# Altium PCB PCB_mini.pcbdoc
Units mil, origin at the board's own origin, x right, y up, seen from the top; angles counter-clockwise.
Board outline 3365 x 3265 mil, 2 copper layers (Top Layer, Bottom Layer); 33 components, 60 nets, 146 pads, 15 vias.
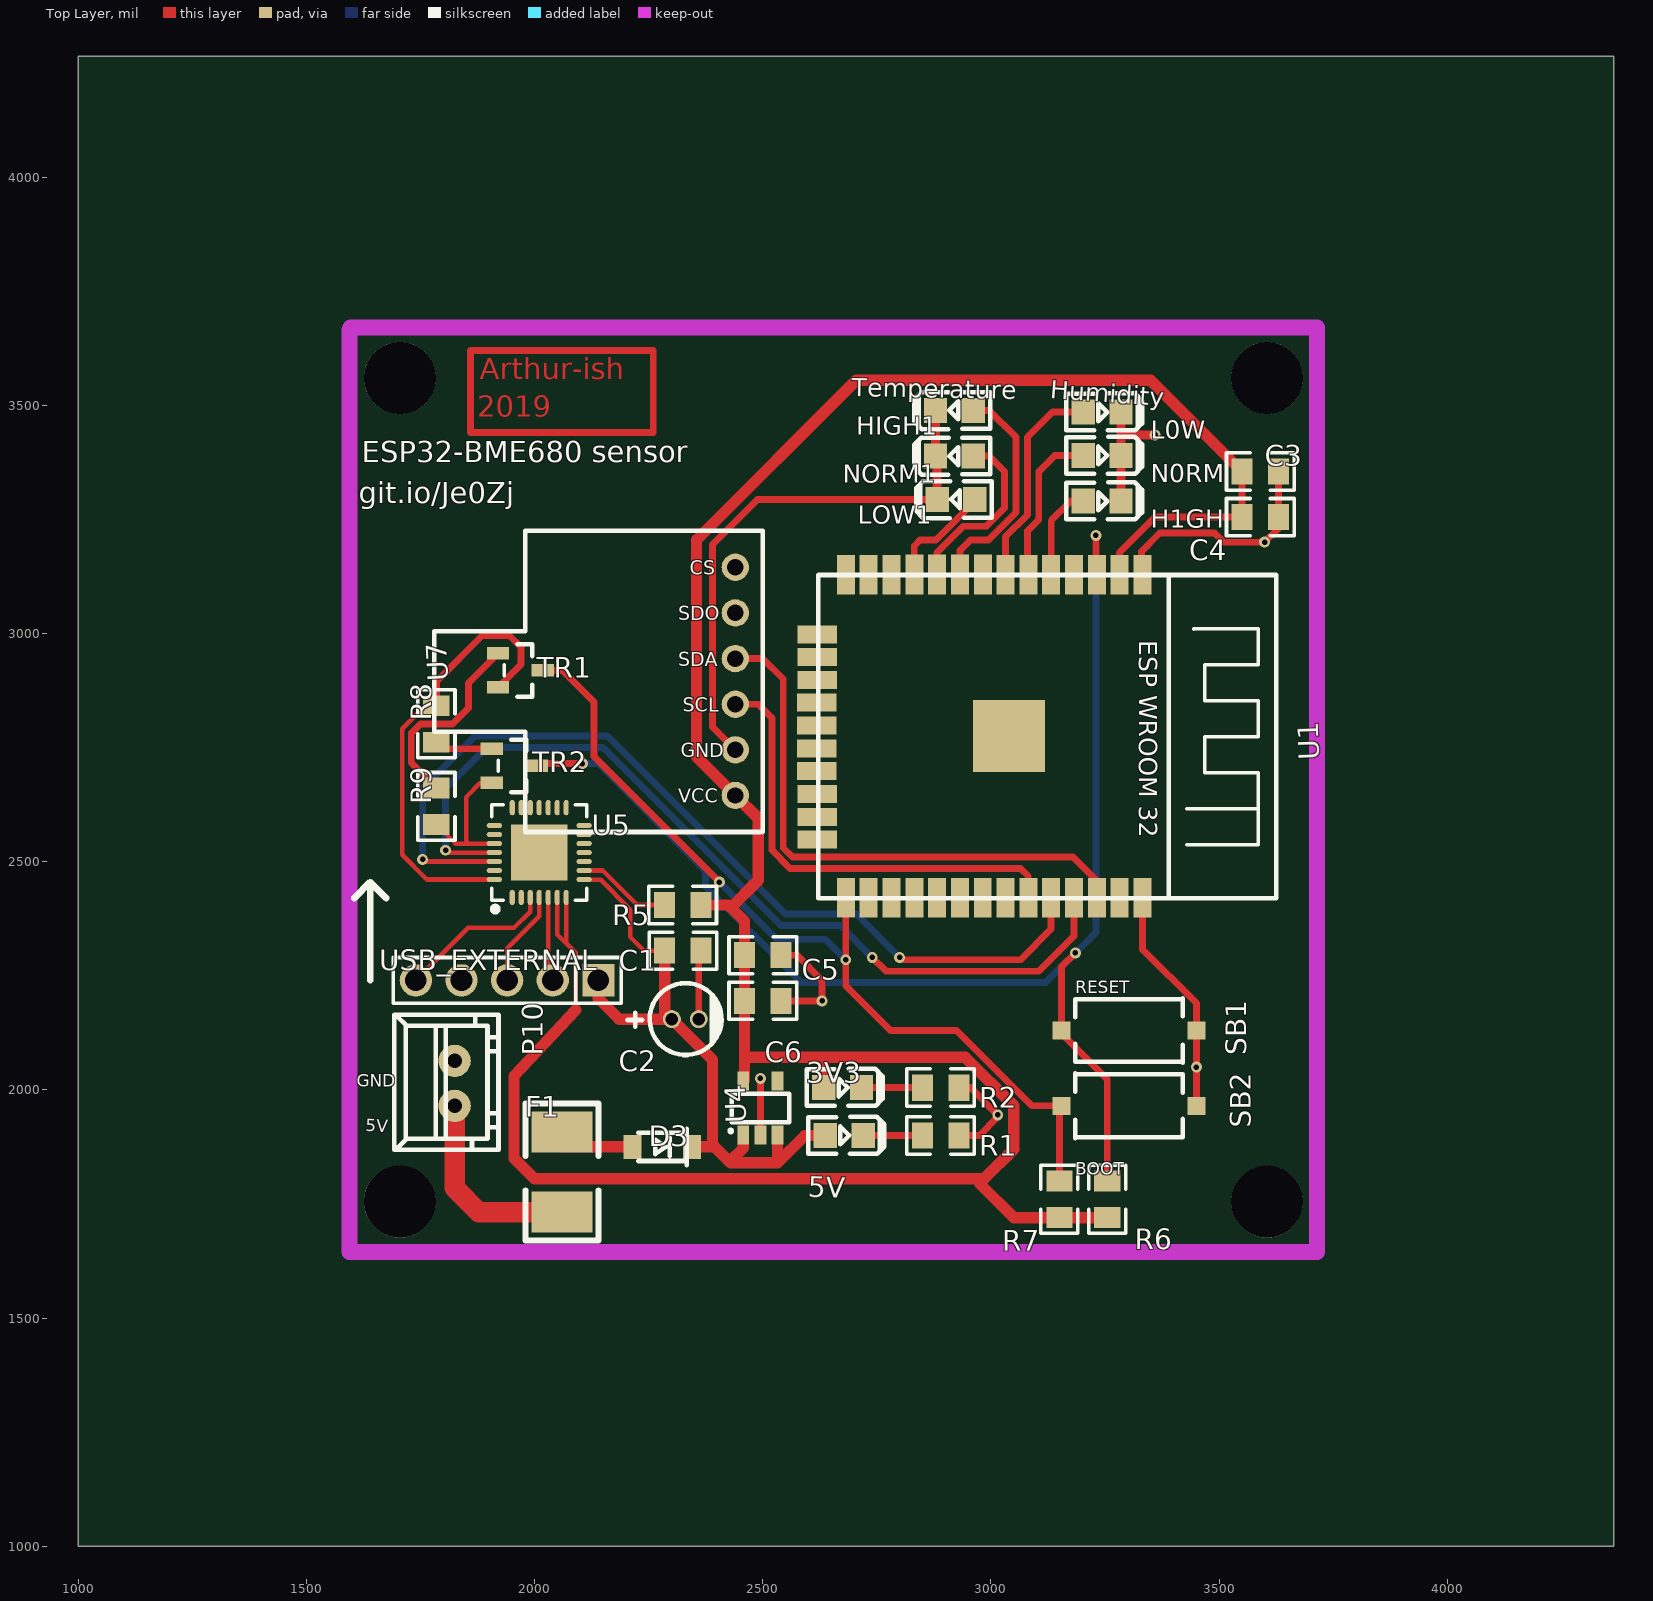
[diagram p0: Top Layer view]
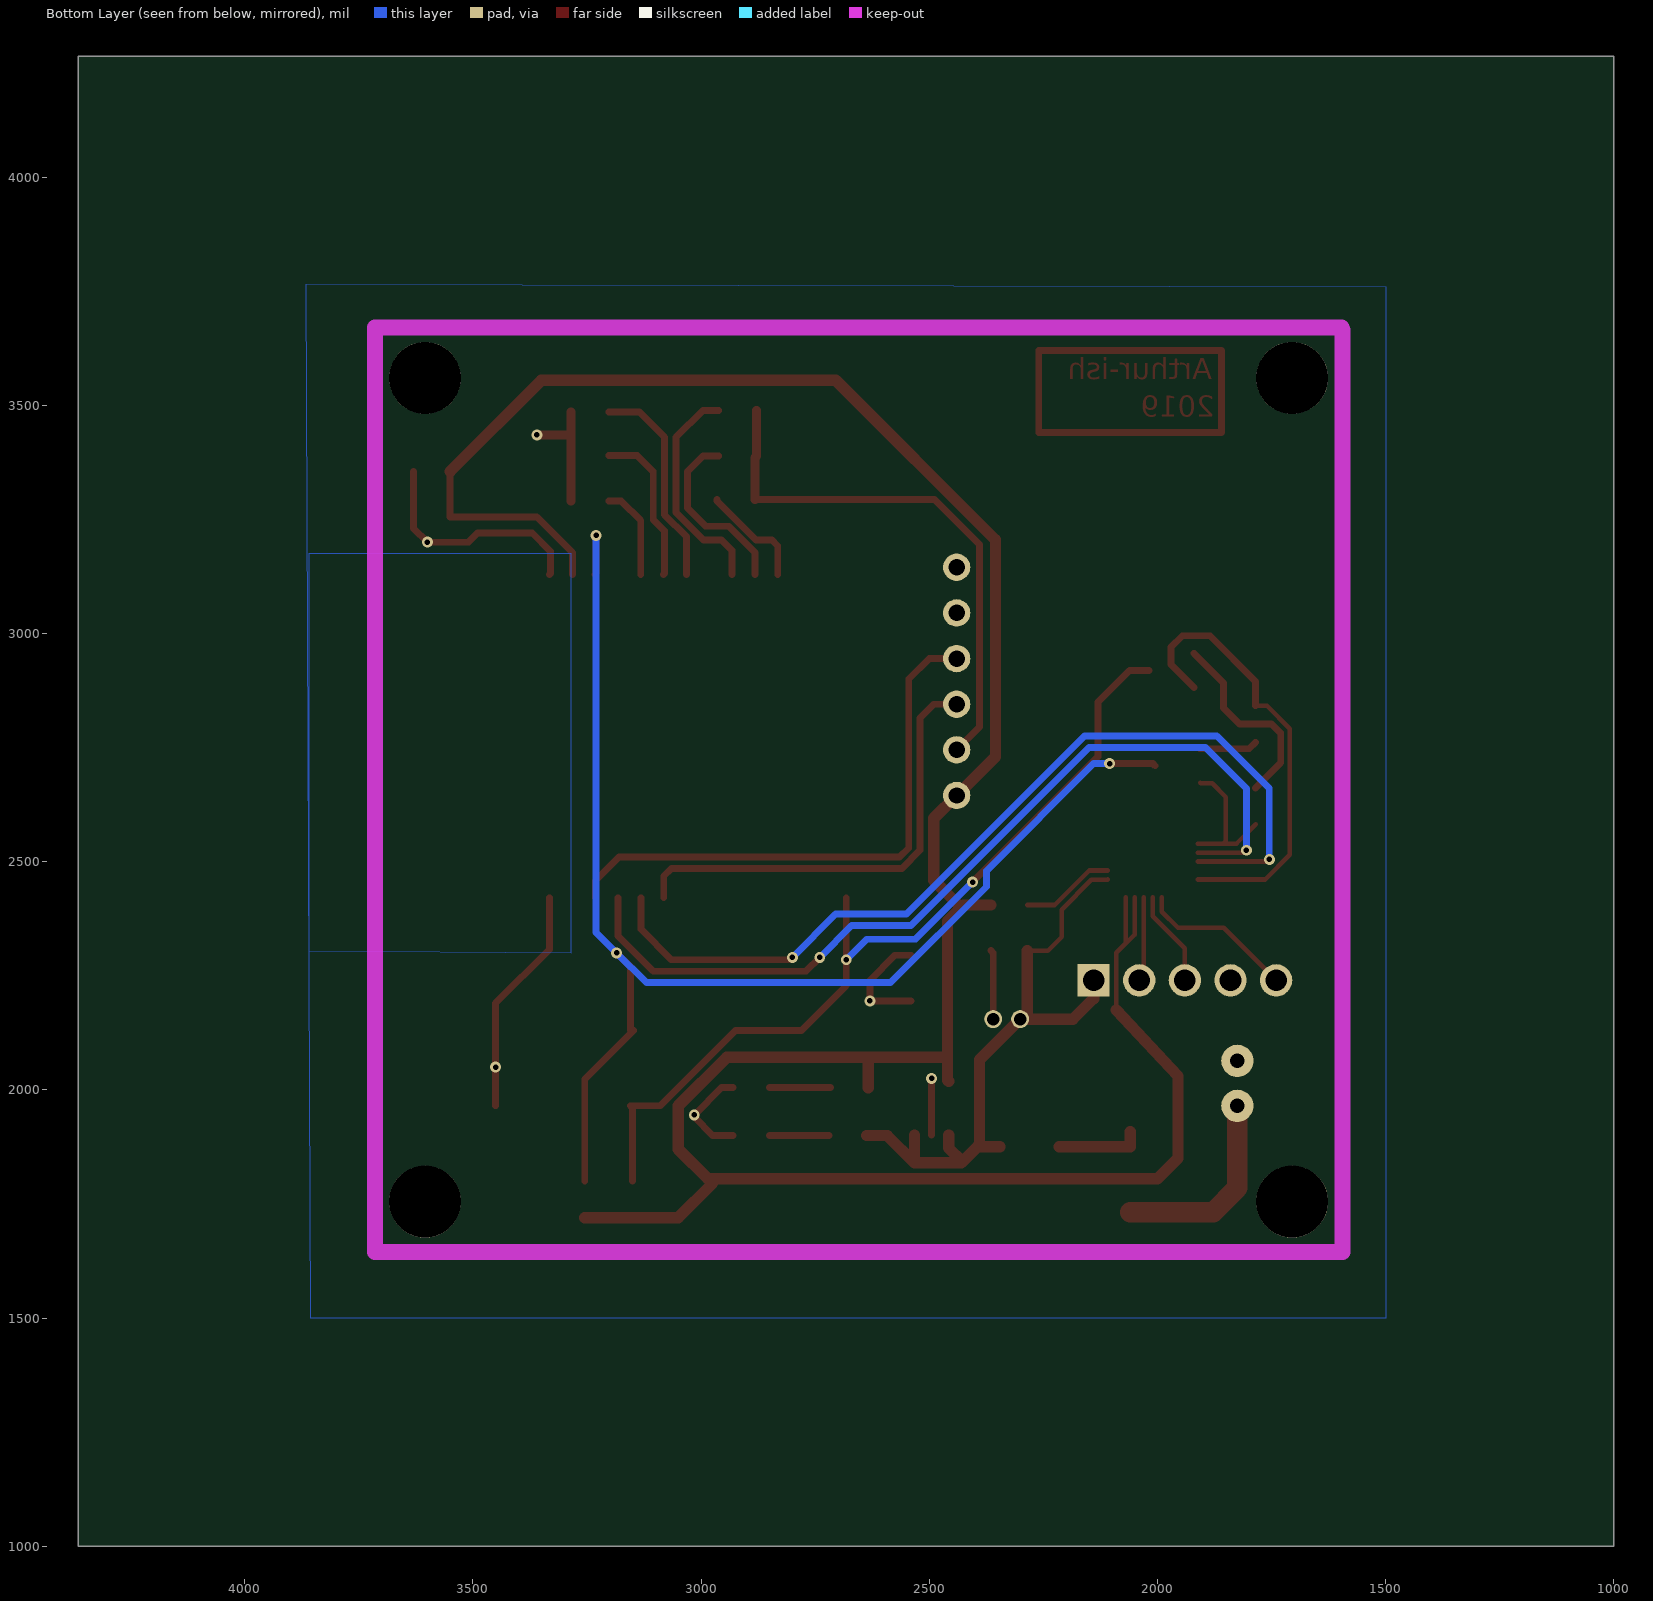
[diagram p1: Bottom Layer view, seen from below]

## Layer stack, top to bottom
Top Layer: signal copper (thickness not stored)
Dielectric: dielectric 12.6, FR-4, Dk 4.8
Bottom Layer: signal copper (thickness not stored)

## Board outline
4365,1000 1000,1000 1000,4265 4365,4265

## Components (designator, comment, footprint, x,y, rotation, side; value= is the part's Value field where it differs from the comment)
3V3 "LED-Yellow(0805)" LED-0805 2675,2005 r180 top
5V "LED-Red(0805)" LED-0805 2678.65,1900 r180 top
C1 "100n" 0805#1 2325,2305 r180 top
C2 "10u" CAP-D4.0XF1.5 2330.45,2155 r90 top
C3 "100n" 0805#1 3590,3355 r180 top
C4 "10u" 0805#1 3590,3255 r180 top
C5 "1u" 0805#1 2500,2295 r180 top
C6 "1u" 0805#1 2500,2195 r180 top
D3 "SMF100A" SOD-123F 2276.1,1875 r0 top
F1 "RF1183-000" 1812 2060,1820 r90 top
H1GH "LED-Yellow(0805)" LED-0805 3243.65,3290 r180 top
HIGH1 "LED-Yellow(0805)" LED-0805 2920,3488.8 r0 top
L0W "LED-Yellow(0805)" LED-0805 3243.65,3485 r180 top
LOW1 "LED-Yellow(0805)" LED-0805 2923.65,3293.8 r0 top
N0RM "LED-Yellow(0805)" LED-0805 3243.65,3390 r180 top
NORM1 "LED-Yellow(0805)" LED-0805 2920,3388.8 r0 top
P10 "power input" XH-2A 1825,2065 r90 top
R1 "2k" 0805#2 2850,1900 r0 top
R2 "2k" 0805#2 2849.99,2005.01 r0 top
R5 "4k7" 0805#1 2325,2405 r0 top
R6 "10k" 0805#1 3255,1760 r270 top
R7 "10k" 0805#1 3150,1760 r270 top
R8 "10k" 0805#2 1785.01,2841.56 r270 top
R9 "10k" 0805#2 1784.99,2581.54 r90 top
SB1 "SMD_Button" "SMD BUTTON AAA" 3460,2130 r270 top
SB2 "SMD_Button" "SMD BUTTON AAA" 3145.16,1965 r90 top
TR1 "BC817.215" SOT-23(SOT-23-3) 2019.2,2919.15 r270 top
TR2 "BC817.215" SOT-23(SOT-23-3) 2005.8,2710 r270 top
U1 "ESP32-Wroom" ESP32_WROOM_FOOTPRINT 3040,2775 r270 top
U4 "ME6211C33M5G-N" SOT-23-5 2495,1960 r90 top
U5 "CP2102N-A01-GQFN28" QFN-28_5X5X05P 2010.3,2519.97 r90 top
U7 "BME680PCB" BME680PCB 2440,2895 r90 top
USB_EXTERNAL "external USB" SIP-5 1940,2240 r180 top

## Footprints (in the part's own frame and the unit in brackets; to place one, negate y for a bottom-side part, rotate by r counter-clockwise, add the part's x,y. Pads: shape width x height; smd on the part's side, far side on the other; paste and mask are expansions set on the pad)
0805#1 [mm]
  rect 1.16x1.45 smd: 1(-1.016,0) 2(1.016,0)
  silkscreen extent -1.9,-1.03 1.87,1.04
0805#2 [mm]
  rect 1.16x1.47 smd: 1(0,0) 2(2.032,0)
  silkscreen extent -0.88,-1.04 2.89,1.04
1812 [mil]
  rect 90x133.86 smd: 1(-88,0) 2(88,0)
  silkscreen extent -150,-80 150,80
BME680PCB [mil]
  round 60 hole 36: 1(-250,0) 2(-150,0) 3(-50,0) 4(50,0) 5(150,0) 6(250,0)
  silkscreen extent -330,-60 330,660
CAP-D4.0XF1.5 [mm]
  round 1 hole 0.7: 1(0,0.751) 2(0,-0.751)
  silkscreen extent -2,-2.02 2,3.23
ESP32_WROOM_FOOTPRINT [mm]
  rect 2.2x1 smd: 1(-8.989,7.423) 2(-8.991,6.148) 3(-8.994,4.88) 4(-8.994,3.61) 5(-8.994,2.34) 6(-8.994,1.07) 7(-8.994,-0.2) 8(-8.996,-1.467) 9(-8.996,-2.737) 10(-8.996,-4.007) 11(-8.996,-5.277) 12(-8.994,-6.55) 13(-8.994,-7.82) 14(-8.994,-9.09) 25(8.992,-9.092) 26(8.992,-7.822) 27(8.992,-6.552) 28(8.989,-5.28) 29(8.989,-4.01) 30(8.989,-2.74) 31(8.989,-1.47) 32(8.992,-0.202) 33(8.992,1.068) 34(8.992,2.338) 35(8.992,3.608) 36(8.992,4.878) 37(8.994,6.145) 38(8.997,7.421)
  rect 1x2.2 smd: 15(-5.668,-10.693) 16(-4.398,-10.693) 17(-3.128,-10.693) 18(-1.86,-10.696) 19(-0.59,-10.696) 20(0.68,-10.696) 21(1.95,-10.696) 22(3.222,-10.693) 23(4.492,-10.693) 24(5.762,-10.693)
  rect 4x4 smd: 39(-0.001,-0.012)
  silkscreen extent -8.97,-10.63 9.03,14.87
LED-0805 [mil]
  rect 51.2x55.1 smd: 1(41.35,0) 2(-41.35,0)
  silkscreen extent -88,-41 78,40
QFN-28_5X5X05P [mm]
  oval 0.85x0.28 smd: 1(-2.5,1.501) 2(-2.5,1.001) 3(-2.5,0.5) 4(-2.5,0) 5(-2.5,-0.5) 6(-2.5,-1.001) 7(-2.5,-1.501) 15(2.5,-1.501) 16(2.5,-1.001) 17(2.5,-0.5) 18(2.5,0) 19(2.5,0.5) 20(2.5,1.001) 21(2.5,1.501)
  oval 0.28x0.85 smd: 8(-1.501,-2.5) 9(-1.001,-2.5) 10(-0.5,-2.5) 11(0,-2.5) 12(0.5,-2.5) 13(1.001,-2.5) 14(1.501,-2.5) 22(1.501,2.5) 23(1.001,2.5) 24(0.5,2.5) 25(0,2.5) 26(-0.5,2.5) 27(-1.001,2.5) 28(-1.501,2.5)
  rect 3.13x3.13 smd: 29(0,0)
  silkscreen extent -3.3,-2.65 2.65,2.65
SIP-5 [mm]
  rect 1.8x1.8 hole 1.2: 1(-5.08,0)
  round 1.8 hole 1.2: 2(-2.54,0) 3(0,0) 4(2.54,0) 5(5.08,0)
  silkscreen extent -6.35,-1.27 6.35,1.27
"SMD BUTTON AAA" [mm]
  rect 1x1 smd: 1(0,-0.25) 2(0,-7.75)
  silkscreen extent -1.8,-7 1.8,-1
SOD-123F [mm]
  rect 1x1.35 smd: 1(-1.55,0) 2(1.75,0)
  silkscreen extent -1.24,-1.02 1.45,1.02
SOT-23(SOT-23-3) [mm]
  rect 0.7x1.25 smd: 1(-0.95,-2.52) 2(0.95,-2.52) 3(0,-0.02)
  silkscreen extent -1.46,-2.17 1.46,-0.62
SOT-23-5 [mm]
  rect 1.06x0.65 smd: 1(-1.5,0.95) 2(-1.5,0) 3(-1.5,-0.95) 4(1.5,-0.95) 5(1.5,0.95)
  silkscreen extent -1.33,-1.6 0.8,1.71
XH-2A [mm]
  round 1.8 hole 0.8: 1(-2.54,0) 2(-0.038,0)
  silkscreen extent -4.98,-2.45 2.54,3.35

## Free pads (board coordinates)
  round 157.48 hole 157.48 unplated: ""(1705,1755) ""(1705,3560) ""(3605,1755) ""(3605,3560)

## Via types
v1: diameter 24, hole 12, Top Layer to Bottom Layer, 15 vias

## Nets (pads, with @x,y where several pads share a name; then routed paths per layer and width w, separated by ;. In a path a pad name is that pad's centre, name@x,y a point inside that pad or via, vN(x,y) a via of type N, cw(c..) or ccw(c..) an arc to the next point about the centre after c; other vN are vias at no path point)
3V3: 3V3.1 C3.2 C4.2 C5.2 C6.2 R5.2 R6.2 R7.2 U1.2 U4.5 U5.6 U5.7 U7.1 | length 6221
  Top Layer w10: U5.6 2049.7,2340.3 2090,2300 2090,2165 ; U5.7 2069.4,2320.6 2070.07,2319.93
  Top Layer w15: U1.2 3282.03,3177.03 3360,3255 C4.2 C3.2
  Top Layer w25: 2090,2175 1955,2030 1955,1850 2000,1805 2985,1805 3050,1870 3050,1965 2944,2071 2460,2071 ; R5.2 2425,2405 2460,2370 C5.2 C6.2 2460,2021.44 U4.5 ; 2430.4,2399.6 2490,2459.3 2490,2595 U7.1 2355,2730 2355,3205 2705,3555 3350,3555 C3.2 ; 2627.21,2071 2633.65,2064.56 3V3.1 ; 2975,1795 3050,1720 R7.2 R6.2
+5V: 5V.1 C1.2 C2.1 D3.2 U4.1 U4.3 U5.8 USB_EXTERNAL.1 | length 1477.2
  Top Layer w10: U5.8 2145,2460 2210,2395 2210,2335 2240,2305 C1.2
  Top Layer w25: USB_EXTERNAL.1 2140,2200 2185,2155 C2.1 ; C1.2 2285,2170.9 C2.1 ; U4.1 2457.6,1872.6 2427.5,1842.5 ; U4.3 2532.4,1840 ; 5V.1 2592.4,1900 2532.4,1840 ; C2.1 2390,2065.9 2390,1875 D3.2 2395,1875 2427.5,1842.5 ; 2427.5,1842.5 2430,1840 2532.4,1840
D+: U5.4 USB_EXTERNAL.3 | length 210.7
  Top Layer w10: USB_EXTERNAL.3 1940,2310 2010.3,2380.3 U5.4
D-: U5.5 USB_EXTERNAL.2 | length 185.7
  Top Layer w10: U5.5 2030,2250 USB_EXTERNAL.2
DTR: R8.1 TR1.2 U5.28 | length 995.7
  Top Layer w10: R8.1 1760,2841.6 1710,2791.6 1710,2515 1764.1,2460.9 U5.28
  Top Layer w15: R8.1 1785,2895 1885,2995 1945,2995 1970,2970 1970,2931.8 TR1.2
EN: R6.1 SB1.2 TR2.3 U1.3 | length 3005.6
  Top Layer w15: TR2.3 2010,2715 v1(2105,2715) ; SB1.2@3147.66,2130 3255,2022.66 R6.1 ; SB1.2 3155,2270 v1(3185,2300) ; v1(3230,3215) 3230,3131.22 U1.3
  Bottom Layer w15: v1(2105,2715) 2140,2715 2375,2480 2375,2445 2585,2235 3120,2235 v1(3185,2300) 3230,2345 v1(3230,3215)
F1_2: D3.1 F1.2 | length 188.1
  Top Layer w25: F1.2 2060,1875 D3.1
GND: C1.1 C2.2 C3.1 C4.1 C5.1 C6.1 H1GH.2 HIGH1.2 L0W.2 LOW1.2 N0RM.2 NORM1.2 P10.2 R1.2 R2.2 SB1.1 SB2.2 U1.1 U1.15 U1.38 U4.2 U5.3 U5.29 U7.2 USB_EXTERNAL.5 | length 3574.3
  Top Layer w10: USB_EXTERNAL.5 1855,2355 1955,2355 1990.6,2390.6 U5.3
  Top Layer w15: C2.2 2360,2300 C1.1 ; U7.2 2390,2795 2390,3195 2488.8,3293.8 LOW1.2 ; U4.2 v1(2495,2025) ; C6.1 v1(2630,2195) 2630,2240 2575,2295 C5.1 ; R1.2 2975,1900 3015,1940 v1(3015,1945) 2955,2005 R2.2 ; U1.38 3332.2,2307.8 3450.2,2189.8 SB1.1 ; U1.1 3330,3131.15 3330,3180 3370,3220 3490,3220 3510,3200 v1(3600,3200) 3630,3230 C4.1 C3.1 ; SB1.1 v1(3450.16,2050) 3450.16,1965.12 SB2.2
  Top Layer w20: HIGH1.2 NORM1.2 2882.3,3385.14 LOW1.2 ; H1GH.2 N0RM.2 L0W.2 ; 3285,3436.16 3286.16,3435 v1(3360,3435)
IO0: R7.1 SB2.1 TR1.3 U1.25 | length 1938.1
  Top Layer w15: TR1.3 2060.85,2919.15 2130,2850 2130,2730 v1(2405,2455) ; U1.25 v1(2682,2285) 2682,2228 2780,2130 2925,2130 3090,1965 SB2.1 3150,1960 R7.1
  Bottom Layer w15: v1(2405,2455) 2530,2330 2635,2330 ; 2635.45,2330 2637,2330 v1(2682,2285)
IO5: U1.29
IO12: U1.14
IO13: U1.16
IO14: U1.13
IO16: U1.27
IO17: U1.28
IO18: U1.30
IO19: U1.31
IO23: U1.37
IO27: U1.12
IO32: U1.8
P10_1: F1.1 P10.1 | length 437
  Top Layer w45: P10.1 1825,1785 1878,1732 F1.1
R1_1: 5V.2 R1.1 | length 130
  Top Layer w15: 5V.2 R1.1
R2_1: 3V3.2 R2.1 | length 133.7
  Top Layer w15: 3V3.2 R2.1
RSTB: R5.1 U5.9 | length 207.6
  Top Layer w10: U5.9 2149.4,2480.6 2225,2405 R5.1
RTS: R9.1 TR2.2 U5.24 | length 317.8
  Top Layer w10: R9.1 1826.88,2539.67 U5.24 ; 1855.5,2539.67 1850,2545.17 1850,2641.55 1880,2671.55 1905.55,2671.55 TR2.2
RX: U1.34 U5.26 | length 2038.2
  Top Layer w10: v1(1755,2505) 1759.73,2500.27 U5.26
  Top Layer w15: v1(2800,2290) 2805,2285 3065,2285 3132,2352 U1.34
  Bottom Layer w15: v1(1755,2505) 1755,2660 1870,2775 2160,2775 2550,2385 2705,2385 v1(2800,2290)
S$18: 
S$20: 
S$21: 
S$23: 
S$91: 
S$93: 
S$1147: 
S$2659: 
S$2715:  | length 1160
  Top Layer w15: 1860,3440 1860,3615 1860,3620 2260,3620 2260,3440 1860,3440
S$2752: 
S$2754: 
SCL: U1.33 U7.3 | length 1015
  Top Layer w15: U7.3 2490,2845 2520,2815 2520,2525 2560,2485 3065,2485 3082,2468 U1.33
SDA: U1.36 U7.4 | length 1247.5
  Top Layer w15: U7.4 2500,2945 2545,2900 2545,2530 2565,2510 3180,2510 3232,2458 U1.36
TR1_1: R9.2 TR1.1 | length 437.5
  Top Layer w15: R9.2 1730,2716.55 1730,2781.55 1750,2801.55 1820,2801.55 1855,2836.55 1855,2891.55 TR1.1
TR2_1: R8.2 TR2.1 | length 127.5
  Top Layer w15: R8.2 1799.15,2747.4 TR2.1
TX: U1.35 U5.25 | length 1977.1
  Top Layer w10: v1(1805,2525) 1810.03,2519.97 U5.25
  Top Layer w15: v1(2740,2290) 2770,2260 3105,2260 3182.03,2337.03 U1.35
  Bottom Layer w15: v1(1805,2525) 1805,2660 1895,2750 2150,2750 2540,2360 2670,2360 v1(2740,2290)
U1_4: U1.4
U1_5: H1GH.1 U1.5 | length 206
  Top Layer w15: U1.5 3132.1,3247.1 3175,3290 H1GH.1
U1_6: N0RM.1 U1.6 | length 348.9
  Top Layer w15: U1.6 3080,3131.2 3080,3225 3105,3250 3105,3355 3140,3390 N0RM.1
U1_7: L0W.1 U1.7 | length 465.8
  Top Layer w15: U1.7 3032.1,3212.1 3080,3260 3080,3430 3135,3485 L0W.1
U1_9: HIGH1.1 U1.9 | length 493.2
  Top Layer w15: U1.9 2932.2,3182.2 2955,3205 2995,3205 3055,3265 3055,3430 2996.2,3488.8 HIGH1.1@2961.3,3488.8
U1_10: NORM1.1 U1.10 | length 399
  Top Layer w15: U1.10 2882.2,3177.2 2940,3235 2990,3235 3030,3275 3030,3355 2996.2,3388.8 NORM1.1@2961.3,3388.8
U1_11: LOW1.1 U1.11 | length 240.1
  Top Layer w15: U1.11 2832.2,3192.2 2845,3205 2880,3205 2965,3290 LOW1.1
U1_17: U1.17
U1_18: U1.18
U1_19: U1.19
U1_20: U1.20
U1_21: U1.21
U1_22: U1.22
U1_23: U1.23
U1_24: U1.24
U1_26: U1.26
U1_32: U1.32
undefined: 
pads on no net: U1.39 U4.4 U5.1 U5.2 U5.10 U5.11 U5.12 U5.13 U5.14 U5.15 U5.16 U5.17 U5.18 U5.19 U5.20 U5.21 U5.22 U5.23 U5.27 U7.5 U7.6 USB_EXTERNAL.4

## Polygon pours and split planes (outlines as drawn)
GND on Bottom Layer (solid): 1500,3760 1500,1500 3855,1500 3865,3765
no net on Bottom Layer (solid): 3860,2305 3285,2300 3285,3175 3860,3175

## Other copper
Top Layer:
  text "Arthur-ish" at 1879.6,3541.3 h80
  text "2019" at 1875,3460 h80

## Silkscreen, mask and mechanical layers (free items; w line width, h text height)
Top Overlay:
  lines w15 net S$2752: 1640,2240 1640,2455 1675,2420
  lines w15 net S$2754: 1605,2420 1640,2455
  text "Temperature" at 2694.65,3520 h40 r359
  text "Humidity" at 3128.6,3515.05 h40 r356
  text "ESP32-BME680 sensor" at 1621.8,3360.3 h80
  text "git.io/Je0Zj" at 1615,3270 h80
  text "GND" at 1610,2006.22 h27.56
  text "5V" at 1629.28,1909.24 h27.56 r357

## Text inside footprints (layer, text, board x,y; h text height)
SB1: Top Overlay "RESET" at 3184.98,2211.22 h27.56
SB2: Top Overlay "BOOT" at 3185,1814.22 h27.56
U1: Top Overlay "ESP WROOM 32" at 3324.7,2985.1 h40 r270
U7: Top Overlay "VCC" at 2315,2628.6 h30; Top Overlay "SCL" at 2325,2828.6 h30; Top Overlay "SDA" at 2315,2928.6 h30; Top Overlay "SDO" at 2315,3028.6 h30; Top Overlay "CS" at 2340,3128.6 h30; Top Overlay "GND" at 2320,2728.6 h30